# EAGLE board Sen (EAGLE 6.0)

Size 115.55 x 54.28 mm. Coordinates in mm from the lower left corner, seen from the top.
Outline: 0,0 115.55,0 115.55,54.28 0,54.28 0,0
Copper layers (1*16): Top 0.035mm / dielectric 1.5mm / Bottom 0.035mm
Design rules: minimum track width 10mil, minimum drill 24mil, track to track 8mil, track to pad 8mil, pad to pad 8mil, via to via 8mil, smd to smd 8mil, copper to edge 40mil, drill to drill 8mil, minimum pad ring 10mil, minimum via ring 8mil, stop-mask expansion 4mil, vias tented up to drill 0mil, thermal gap 10mil

## Footprints (pad centres in the part's own frame; a part is rotated, then mirrored left to right if it is on the bottom)
0402-CAP = smd 0.7 x 0.9: 1 -0.65,0; 2 0.65,0
EIA3216 = smd 1.4 x 1.6: A 1.4,0; C -1.4,0
1X02_NO_SILK = drill 1.016 pad 1.88: 1 0,0; 2 2.54,0
JP4 = drill 0.914 long: 1 -3.81,0; 2 -1.27,0; 3 1.27,0; 4 3.81,0
FTDI_BASIC = drill 1.016 pad 1.88: CTS 10.16,0; DTR 0,0; GND 12.7,0; RXI 2.54,0; TXO 5.08,0; VCC 7.62,0
LED-0603 = smd 0.8 x 0.8: A 0,-0.75; C 0,0.75
0402-RES = smd 0.7 x 0.9: 1 -0.65,0; 2 0.65,0
RN-9 = drill 0.813 long: 1 -10.16,0; 2 -7.62,0; 3 -5.08,0; 4 -2.54,0; 5 0,0; 6 2.54,0; 7 5.08,0; 8 7.62,0; 9 10.16,0
AYZ0202 = smd 1 x 1.15: 1 -2.5,2.825; 2 0,2.825; 3 2.5,2.825; 4 -2.5,-2.825; 5 0,-2.825; 6 2.5,-2.825 | hole 0.85: 1.5,0; -1.5,0
SYNAPSE_SN700PC1 = smd 2.54 x 1.02: P$1 0,28.83; P$2 0,27.56; P$3 0,26.32; P$4 0,25.02; P$5 0,23.75; P$6 0,22.48; P$7 0,21.21; P$8 0,19.94; P$9 0,18.67; P$10 0,17.4; P$11 0,16.13; P$12 0,14.86; P$13 0,13.59; P$14 0,12.32; P$15 0,11.05; P$16 0,9.78; P$17 0,8.51; P$18 0,7.24; P$19 0,5.97; P$20 0,4.7; P$21 0,3.43; P$40 25.41,3.43; P$41 25.4,4.7; P$42 25.42,5.97; P$43 25.4,7.24; P$44 25.4,8.51; P$45 25.4,9.78; P$46 25.4,11.05; P$47 25.4,12.32; P$48 25.4,13.59; P$49 25.4,14.86; P$50 25.4,16.13; P$51 25.4,17.4; P$52 25.4,18.67; P$53 25.4,19.94; P$54 25.4,21.21; P$55 25.4,22.48; P$56 25.4,23.75; P$57 25.4,25.02; P$58 25.4,26.29; P$59 25.4,27.56; P$60 25.4,28.83 | smd 1.02 x 2.54: P$22 1.91,1.27; P$23 3.19,1.26; P$24 4.46,1.26; P$25 5.73,1.26; P$26 7,1.26; P$27 8.27,1.26; P$28 9.54,1.26; P$29 10.82,1.26; P$30 12.09,1.26; P$31 13.35,1.26; P$32 14.62,1.26; P$33 15.89,1.26; P$34 17.16,1.26; P$35 18.43,1.26; P$36 19.7,1.26; P$37 20.97,1.26; P$38 22.24,1.26; P$39 23.51,1.26
SOT23-5 = smd 0.55 x 1.2: 1 -0.95,-1.3; 2 0,-1.3; 3 0.95,-1.3; 4 0.95,1.3; 5 -0.95,1.3
53047-10 = drill 0.5 pad 0.698 long: 1 5.625,0.45; 2 4.375,0.45; 3 3.125,0.45; 4 1.875,0.45; 5 0.625,0.45; 6 -0.625,0.45; 7 -1.875,0.45; 8 -3.125,0.45; 9 -4.375,0.45; 10 -5.625,0.45

## Placement (x,y rotation side)
C1  10uF  [0402-CAP]  3.81,12.7 180 top
C3  10uF  [EIA3216]  59.69,52.07 0 top
C4  10uF  [EIA3216]  59.69,44.45 0 top
C5  1uF  [0402-CAP]  60.96,41.91 180 top
I2C_BUS  I2C_BUS  [1X02_NO_SILK]  5.08,49.53 180 top
JP1  LIPO_charger  [JP4]  69.85,48.26 270 top
JP2  FTDI_BASICPTH  [FTDI_BASIC]  25.4,8.89 180 top
LED2  RED  [LED-0603]  59.69,36.83 90 top
R2  100k  [0402-RES]  15.24,45.72 0 top
R6  1k  [0402-RES]  59.69,38.1 180 top
RN1  [RN-9]  59.69,15.24 270 top
S1  [AYZ0202]  67.31,38.1 0 top
SMD1  SM700PC1SMD  [SYNAPSE_SN700PC1]  29.21,16.51 90 top
U2  MIC5219  [SOT23-5]  59.69,48.26 90 top
X1  ADC0-7  [53047-10]  66.04,16.51 90 top

## Library data of the parts
C1 C3-C5 R2 R6 = SparkFun-Passives
I2C_BUS JP2 = SparkFun-Connectors
JP1 = jumper
LED2 = SparkFun-LED
RN1 = resistor-net; OC_FARNELL: unknown; OC_NEWARK: unknown
S1 = SparkFun-Electromechanical
SMD1 = Synapse_SM700PC1
U2 = SparkFun-PowerIC
X1 = con-molex; MF: MOLEX; MPN: 53047-1010; OC_FARNELL: 9733086; OC_NEWARK: 57H4711

## Nets
3.3V: C1.1 C4.A C5.1 JP2.VCC R2.2 R6.2 SMD1.P$12 SMD1.P$31 U2.5 X1.1 X1.2
ADC0: RN1.2 SMD1.P$8 X1.3
ADC1: RN1.3 SMD1.P$9 X1.4
ADC2: RN1.4 SMD1.P$10 X1.5
ADC3: RN1.5 SMD1.P$11 X1.6
ADC4: RN1.6 SMD1.P$13 X1.7
ADC5: RN1.7 SMD1.P$14 X1.8
ADC6: RN1.8 SMD1.P$15 X1.9
ADC7: RN1.9 SMD1.P$16 X1.10
CTS2: JP2.CTS SMD1.P$23
EN: JP1.4
GND: C1.2 C3.C C4.C C5.2 JP1.3 JP2.GND LED2.C RN1.1 SMD1.P$1 SMD1.P$2 SMD1.P$3 SMD1.P$22 SMD1.P$38 SMD1.P$51 SMD1.P$58 SMD1.P$59 SMD1.P$60 U2.2
N$7: LED2.A R6.1
N$10: SMD1.P$17
N$11: SMD1.P$18
N$12: SMD1.P$19
PS: JP1.1
RESET: R2.1 SMD1.P$49
RTS2: JP2.DTR SMD1.P$21
RX2: JP2.TXO SMD1.P$24
SCL: I2C_BUS.2 SMD1.P$29
SDA: I2C_BUS.1 SMD1.P$28
TX2: JP2.RXI SMD1.P$25
VBATT: JP1.2 S1.3
VIN: C3.A S1.2 U2.1 U2.3

## Tracks (layer width: path | path; a pad name or v marks a point on that pad's centre or on a via)
3.3V  (10 unrouted)
ADC0  (2 unrouted)
ADC1  (2 unrouted)
ADC2  (2 unrouted)
ADC3  (2 unrouted)
ADC4  (2 unrouted)
ADC5  (2 unrouted)
ADC6  (2 unrouted)
ADC7  (2 unrouted)
CTS2  (1 unrouted)
GND  (17 unrouted)
N$7  (1 unrouted)
RESET  (1 unrouted)
RTS2  (1 unrouted)
RX2  (1 unrouted)
SCL  (1 unrouted)
SDA  (1 unrouted)
TX2  (1 unrouted)
VBATT  (1 unrouted)
VIN  (3 unrouted)